# EAGLE board PCB v51 (EAGLE 9.7.0)
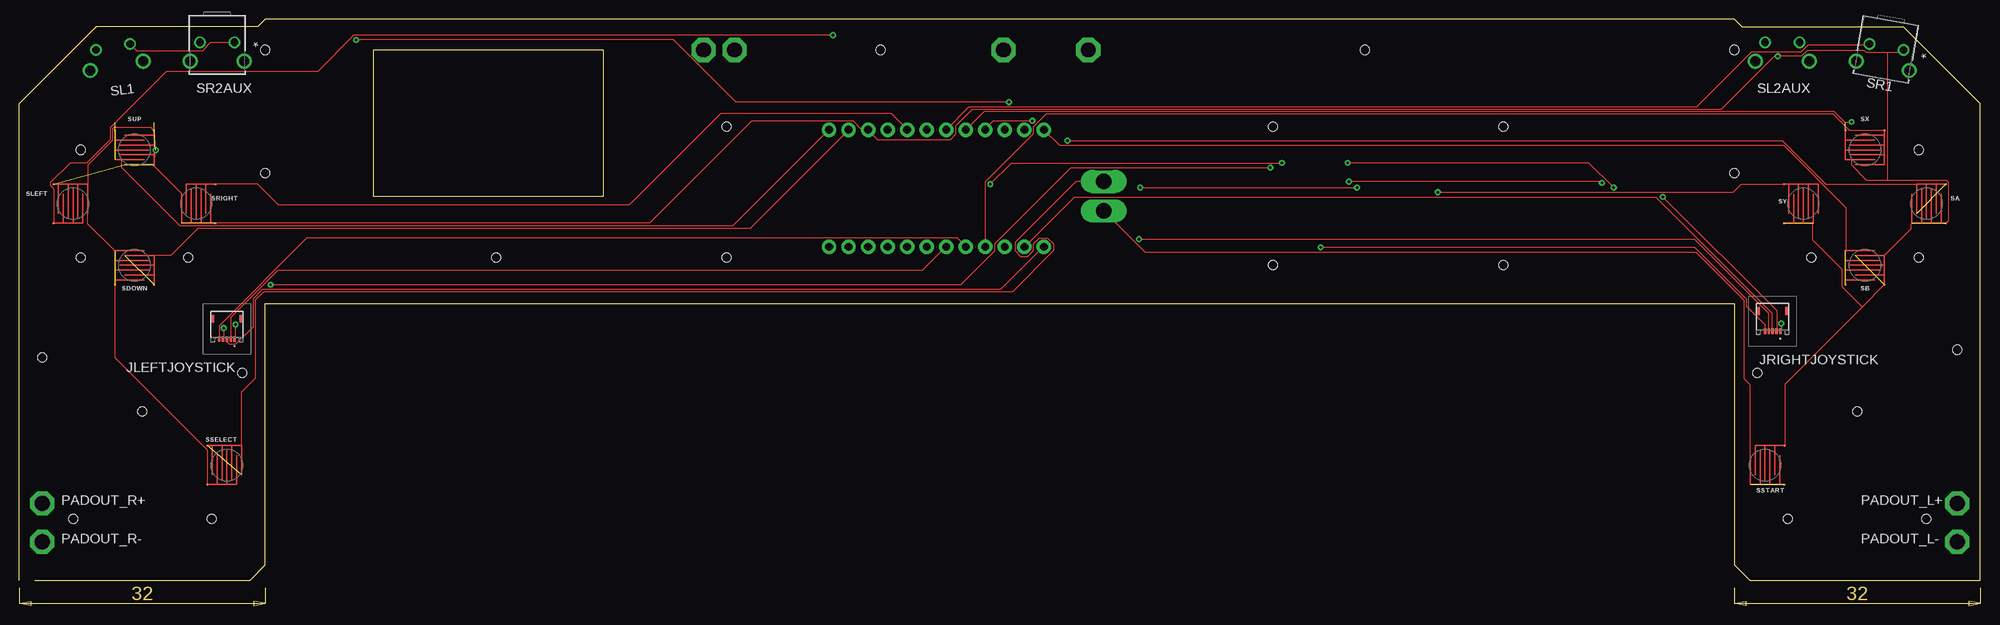
[diagram p0: board, top side]
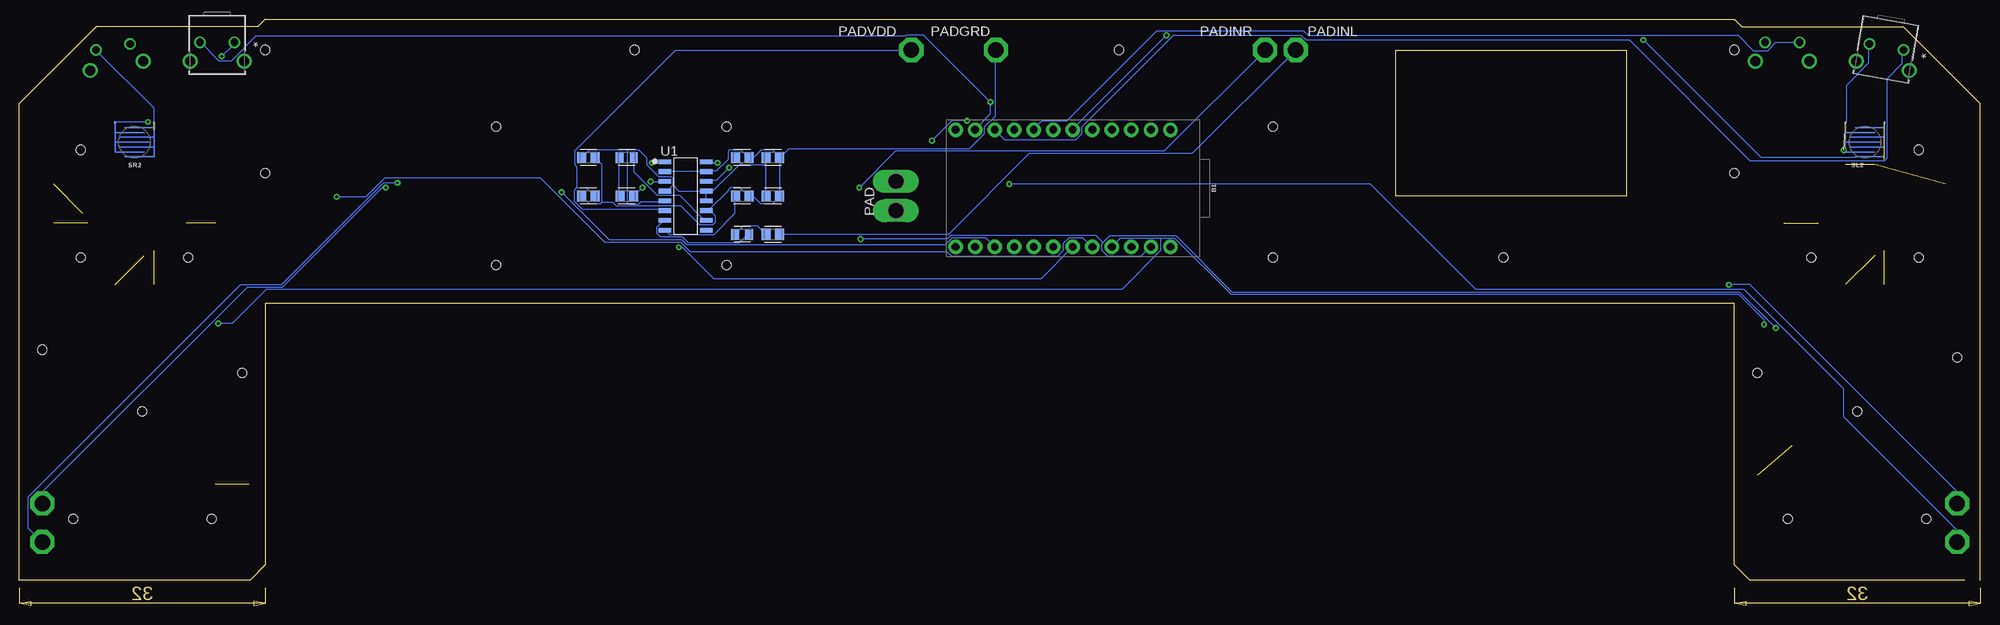
[diagram p1: board, bottom side, seen from below]

Size 255 x 73 mm. Coordinates in mm from the lower left corner, seen from the top.
Outline: 2,0 30,0 32,2 32,36 223,36 223,2 225,0 255,0 255,62 245,72 224,72 223,73 32,73 31,72 10,72 0,62 0,0
Outline: 46,69 46,50 76,50 76,69 46,69
Copper layers (1*16): Top / Bottom
Stack-up Default Layer Stack: Top User Defined 0.035mm / Dielectric-1 User Defined 1.5mm / Bottom User Defined 0.035mm
Design rules "default": minimum track width 6mil, minimum drill 0.35mm, track to track 6mil, track to pad 6mil, pad to pad 6mil, via to via 6mil, smd to smd 6mil, copper to edge 40mil, drill to drill 6mil, minimum pad ring 10mil, minimum via ring 8mil, stop-mask expansion 4mil, vias tented up to drill 0mil, thermal gap 10mil
Holes 1.2 mm at 7,8 25,8 16,22 3,29 29,27 248,8 230,8 239,22 226,27 252,30 32,69 223,69 62,42 92,42 193,41 163,41 163,59 193,59 8,42 22,42 8,56 112,69 175,69 233,42 247,42 247,56 223,53 32,53 92,59

## Footprints (pad centres in the part's own frame; a part is rotated, then mirrored left to right if it is on the bottom)
SPARKFUN_PRO_MICRO = drill 1.016 pad 1.88: 1 -7.62,12.7; 2 -7.62,10.16; 3 -7.62,7.62; 4 -7.62,5.08; 5 -7.62,2.54; 6 -7.62,0; 7 -7.62,-2.54; 8 -7.62,-5.08; 9 -7.62,-7.62; 10 -7.62,-10.16; 11 -7.62,-12.7; 12 -7.62,-15.24; 13 7.62,-15.24; 14 7.62,-12.7; 15 7.62,-10.16; 16 7.62,-7.62; 17 7.62,-5.08; 18 7.62,-2.54; 19 7.62,0; 20 7.62,2.54; 21 7.62,5.08; 22 7.62,7.62; 23 7.62,10.16; 24 7.62,12.7
CAPC2012X110 = smd 1.165 x 1.465: 1 -0.875,0; 2 0.875,0
5034800500 = smd 0.3 x 0.7: 1 -1,1.6; 2 -0.5,1.6; 3 0,1.6; 4 0.5,1.6; 5 1,1.6 | smd 0.3 x 1: MP1 -1.79,-1.05; MP2 1.79,-1.05
P2-38-20 = drill 2.007 pad 2.54 long: TP-1 -1.905,0; TP-2 1.905,0
P1-20 = drill 2.007 pad 3.15 octagon: TP 0,0
RESC2012X65 = smd 1.031 x 1.42: 1 -0.919,0; 2 0.919,0
BUTTON-CONDUCTIVE = smd 0.203 x 0.203: 1 2.54,2.54; 2 2.54,-2.54
SW2_1825027-A = drill 0.991 pad 1.499: 1 0,0; 2 4.496,0 | drill 1.295 pad 1.803: 3 -1.245,2.489; 4 5.766,2.489
SOIC127P605X150-16N = smd 1.6 x 0.6: 1 -2.7,4.445; 2 -2.7,3.175; 3 -2.7,1.905; 4 -2.7,0.635; 5 -2.7,-0.635; 6 -2.7,-1.905; 7 -2.7,-3.175; 8 -2.7,-4.445; 9 2.7,-4.445; 10 2.7,-3.175; 11 2.7,-1.905; 12 2.7,-0.635; 13 2.7,0.635; 14 2.7,1.905; 15 2.7,3.175; 16 2.7,4.445

## Placement (x,y rotation side)
B1  SPARKFUN_PRO_MICRO  [SPARKFUN_PRO_MICRO]  118,51 270 bottom
C1  220nF  [CAPC2012X110]  157,45 0 bottom
C2  220nF  [CAPC2012X110]  176,50 0 bottom
C3  1uF  [CAPC2012X110]  161,50 0 bottom
C4  1uF  [CAPC2012X110]  181,50 0 bottom
C5  1uF  [CAPC2012X110]  181,55 0 bottom
C6  10uF  [CAPC2012X110]  157,50 0 bottom
C7  1uF  [CAPC2012X110]  157,55 0 bottom
C8  10uF  [CAPC2012X110]  161,55 0 bottom
JLEFTJOYSTICK  503480-0500  [5034800500]  27,33 180 top
JRIGHTJOYSTICK  503480-0500  [5034800500]  228,34 180 top
PAD  TP2P2-38-20  [P2-38-20]  141,50 90 bottom
PADGRD  PTR1PAD1-20  [P1-20]  128,69 0 top
PADINL  PTR1PAD1-20  [P1-20]  89,69 0 top
PADINR  PTR1PAD1-20  [P1-20]  93,69 0 top
PADOUT_L+  PTR1PAD1-20  [P1-20]  252,10 0 top
PADOUT_L-  PTR1PAD1-20  [P1-20]  252,5 0 top
PADOUT_R+  PTR1PAD1-20  [P1-20]  3,10 0 top
PADOUT_R-  PTR1PAD1-20  [P1-20]  3,5 0 top
PADVDD  PTR1PAD1-20  [P1-20]  139,69 0 top
R1  10k  [RESC2012X65]  161,45 0 bottom
R2  10k  [RESC2012X65]  176,55 0 bottom
SA  BUTTON-CONDUCTIVESMD  [BUTTON-CONDUCTIVE]  248,49 0 top
SB  BUTTON-CONDUCTIVESMD  [BUTTON-CONDUCTIVE]  240,41 270 top
SDOWN  BUTTON-CONDUCTIVESMD  [BUTTON-CONDUCTIVE]  15,41 270 top
SL1  1825027-5  [SW2_1825027-A]  10,69 170 bottom
SL2  BUTTON-CONDUCTIVESMD  [BUTTON-CONDUCTIVE]  15,57 90 bottom
SL2AUX  1825027-5  [SW2_1825027-A]  227,70 180 bottom
SLEFT  BUTTON-CONDUCTIVESMD  [BUTTON-CONDUCTIVE]  7,49 180 top
SR1  1825027-5  [SW2_1825027-A]  245,69 170 top
SR2  BUTTON-CONDUCTIVESMD  [BUTTON-CONDUCTIVE]  240,57 90 bottom
SR2AUX  1825027-5  [SW2_1825027-A]  28,70 180 top
SRIGHT  BUTTON-CONDUCTIVESMD  [BUTTON-CONDUCTIVE]  23,49 0 top
SSELECT  BUTTON-CONDUCTIVESMD  [BUTTON-CONDUCTIVE]  27,15 180 top
SSTART  BUTTON-CONDUCTIVESMD  [BUTTON-CONDUCTIVE]  227,15 0 top
SUP  BUTTON-CONDUCTIVESMD  [BUTTON-CONDUCTIVE]  15,56 90 top
SX  BUTTON-CONDUCTIVESMD  [BUTTON-CONDUCTIVE]  240,56 90 top
SY  BUTTON-CONDUCTIVESMD  [BUTTON-CONDUCTIVE]  232,49 180 top
U1  PAM8403DR  [SOIC127P605X150-16N]  168.34,50 0 bottom

## Library data of the parts
B1 = SparkFun-Boards
C1-C8 = Capacitor; CATEGORY: Capacitor
JLEFTJOYSTICK JRIGHTJOYSTICK = SamacSys_Parts; DESCRIPTION: FFC & FPC Connectors 0.5mm FPC BF H=1.0 Assy 5P; HEIGHT: 1.3mm; MANUFACTURER_NAME: Molex; MANUFACTURER_PART_NUMBER: 503480-0500; MOUSER_PART_NUMBER: 538-503480-0500; MOUSER_PRICE-STOCK: https://www.mouser.co.uk/ProductDetail/Molex/503480-0500?qs=gt1LBUVyoHk%2Fe71glqHWvw%3D%3D
PAD PADGRD PADINL PADINR PADOUT_L+ PADOUT_L- PADOUT_R+ PADOUT_R- PADVDD = testpad
R1 R2 = Resistor; CATEGORY: Resistor; SUB-CATEGORY: Fixed
SA SB SDOWN SL2 SLEFT SR2 SRIGHT SSELECT SSTART SUP SX SY = SparkFun-Switches
SL1 SL2AUX SR1 SR2AUX = Switches; BUILT_BY: EMA_UL_Team; CATEGORY: Tactile Switches; CONFIGURATION__POLE-THROW_: Single Pole - Single Throw; CONTACT_CURRENT_RATING: 50; COPYRIGHT: Copyright (C) 2016 Accelerated Designs. All rights reserved; DESCRIPTION: FSMRA2JH04=R/A,TACT PB SW,160G; MANUFACTURER_PART_NUMBER: 1825027-5; MAX_SWITCHING_CURRENT: -; MAX_SWITCHING_VOLTAGE_AC_: -; PART_STATUS: active; PRODUCT_TYPE: Switch; SERIES: Unknown; SWITCH_TYPE: Tactile Switches; TE_INTERNAL_NUMBER: 1825027-5; TE_PART_NUMBER: 1825027-5; VENDOR: TE Connectivity; VOLTAGE_RATING: -
U1 = SnapEDA Library; MANUFACTURER: Diodes

## Nets
GND: B1.4
N$2: B1.1 SUP.1
N$3: B1.2 SDOWN.1
N$4: B1.5 SRIGHT.1
N$5: B1.13 JLEFTJOYSTICK.3
N$6: B1.6 SLEFT.1
N$7: B1.7 SR1.2
N$8: B1.8 SR2.1 SR2AUX.2
N$9: B1.9 SA.1
N$10: B1.14 JRIGHTJOYSTICK.3
N$11: B1.12 SB.2
N$12: B1.11 SL2.2 SL2AUX.2
N$13: B1.10 SL1.1
N$14: B1.15 SY.2
N$15: B1.16 SX.2
N$16: PAD.TP-2 SSELECT.2
N$17: PAD.TP-1 SSTART.2
N$18: C1.1 R1.1
N$19: C2.1 R2.1
N$20: R2.2 U1.10
N$21: R1.2 U1.7
N$22: C4.2 PADVDD.TP U1.6
N$23: PADOUT_R+.TP U1.14
N$24: PADOUT_R-.TP U1.16
N$25: PADOUT_L-.TP U1.3
N$26: PADOUT_L+.TP U1.1
N$27: C3.1 U1.8
N$28: C5.1 C6.1 C7.1 C8.1 U1.4 U1.5 U1.12 U1.13
N$29: C3.2 C4.1 C5.2 C6.2 C7.2 C8.2 PADGRD.TP U1.2 U1.11 U1.15
N$30: B1.21 JLEFTJOYSTICK.1 JRIGHTJOYSTICK.1
N$31: B1.23 JLEFTJOYSTICK.4 JRIGHTJOYSTICK.4
N$32: C1.2 PADINL.TP
N$33: C2.2 PADINR.TP
N$34: B1.20 JRIGHTJOYSTICK.2
N$35: B1.19 JRIGHTJOYSTICK.5
N$36: B1.18 JLEFTJOYSTICK.2
N$37: B1.17 JLEFTJOYSTICK.5
N$38: B1.3 SA.2 SB.1 SDOWN.2 SL1.2 SL2.1 SL2AUX.1 SLEFT.2 SR1.1 SR2.2 SR2AUX.1 SRIGHT.2 SSELECT.1 SSTART.1 SUP.2 SX.1 SY.1
RAW: B1.24

## Tracks (layer width: path | path; a pad name or v marks a point on that pad's centre or on a via)
N$2  (1 unrouted)
  Top 0.152: 12.46,54.73 13.33,54.76 13.33,53.69 20.95,46.07 92.73,46.07 105.22,58.57 B1.1
N$3  (1 unrouted)
  Top 0.152: 13.73,42.27 17.59,42.26 19.73,42.26 23.23,45.77 95.01,45.77 107.82,58.57 B1.2
N$4
  Top 0.152: SRIGHT.1 25.52,51.56 31.01,51.56 33.75,48.82 79.32,48.82 91.2,60.7 113.45,60.7 115.44,58.72 B1.5
N$5
  Top 0.152: JLEFTJOYSTICK.3 27.04,31.29 27.04,30.98 27.35,30.68 28.11,30.68 30.4,32.97 30.4,36.62 31.62,37.84 127.63,37.84 133.11,43.33 B1.13
N$6  (via drill 0.35)
  Top 0.152: v105.83,70.91 43.5,70.91 38.78,66.19 19.12,66.19 11.8,58.87 11.8,57.35 8.76,54.3 6.62,54.3 4.03,51.71 4.03,51.41 4.49,50.95 4.49,46.53 SLEFT.1
  Bottom 0.152: v105.83,70.91 118.03,58.72 B1.6
N$7
  Top 0.152: SR1.2 240.56,69.69 232.63,69.69 231.72,68.78 225.32,68.78 218.15,61.62 123.51,61.62 120.62,58.72 B1.7
N$8  (via drill 0.35)
  Top 0.152: v238.27,59.64 237.36,59.64 235.98,61.01 125.49,61.01 123.21,58.72 B1.8
  Bottom 0.152: v238.27,59.64 242.54,59.64 SR2.1 | SR2AUX.2 23.54,70 26.59,70 27.65,68.93 29.48,68.93 31.46,70.91 87.39,70.91 88,71.52 107.05,71.52 118.79,59.79 121.99,59.79 123.06,58.72 B1.8
N$9  (via drill 0.35)  (1 unrouted)
  Top 0.152: v136.31,57.2 229.28,57.2 234.92,51.56 246.65,51.56 246.73,47.73 | v131.74,59.79 126.71,59.79 125.65,58.72 B1.9
  Bottom 0.152: v136.31,57.2 133.72,59.79 v131.74,59.79
N$10
  Top 0.152: JRIGHTJOYSTICK.3 227.91,32.51 227.91,34.8 212.82,49.88 137.23,49.88 130.83,43.48 B1.14
N$11  (1 unrouted)
  Top 0.152: 237.46,42.91 237.51,42.87 237.51,48.51 229.43,56.59 135.25,56.59 133.27,58.57 B1.12
N$12  (via drill 0.35)  (1 unrouted)
  Top 0.152: v43.81,70.3 85.11,70.3 93.19,62.23 v128.69,62.23
  Bottom 0.152: v43.81,70.3 28.57,55.06 16.22,55.06 12.46,55.09 | B1.11 130.68,58.72 128.69,60.7 v128.69,62.23 137.38,70.91 139.67,70.91 139.82,70.76 224.25,70.76 227.45,67.56 228.97,67.56 231.41,70 SL2AUX.2
N$13
  Bottom 0.152: SL1.1 10.13,68.93 10.13,67.26 12.11,65.28 12.11,54.91 12.41,54.61 29.94,54.61 45.64,70.3 87.7,70.3 88.31,70.91 104.92,70.91 116.81,59.03 116.81,58.11 117.57,57.35 126.87,57.35 128.09,58.57 B1.10
N$14  (via drill 0.35)
  Top 0.152: v184.47,50.49 222.88,50.49 223.94,51.56 229.43,51.56 SY.2
  Bottom 0.152: v184.47,50.49 178.22,44.24 168.78,44.24 168.17,43.63 134.64,43.63 133.72,44.55 129.3,44.55 128.24,43.48 B1.15
N$15
  Top 0.152: SX.2 242.54,58.57 237.97,58.57 235.83,60.7 133.57,60.7 131.9,59.03 131.9,58.11 125.65,51.86 125.65,43.48 B1.16
N$16  (1 unrouted)
  Top 0.152: 28.91,13.73 28.87,17.57 28.87,24.43 30.7,26.26 30.7,36.47 31.77,37.54 129.15,37.54 134.49,42.87 134.49,43.79 133.72,44.55 132.66,44.55 131.9,43.79 131.9,42.87 131.13,42.11 130.22,42.11 129.46,42.87 129.46,43.94 137.38,51.86 140.89,51.86 PAD.TP-2
N$17  (1 unrouted)
  Top 0.152: 225.09,12.46 225.01,16.2 225.01,25.5 224.25,26.26 224.25,36.47 218,42.72 146.37,42.72 141.04,48.05 PAD.TP-1
N$18
  Bottom 0.152: R1.1 160.85,46.07 159.02,46.07 157.96,45.01 C1.1
N$19
  Bottom 0.152: R2.1 177,54.91 177,50.03 C2.1
N$20
  Bottom 0.152: R2.2 175.02,54.91 175.02,53.08 171.98,50.03 169.08,50.03 165.73,46.68 U1.10
N$21
  Bottom 0.152: R1.2 160.09,44.85 160.39,44.85 161.31,43.94 168.01,43.94 168.78,44.7 171.67,44.7 172.13,45.16 172.13,45.92 171.37,46.68 171.06,46.68 U1.7
N$22
  Bottom 0.152: 182.49,51.1 181.27,51.1 180.21,50.03 C4.2 | 182.49,51.1 182.8,50.8 182.8,49.27 181.73,48.21 171.06,48.21 U1.6 | 182.49,51.1 182.49,53.84 182.8,54.15 182.8,55.83 169.69,68.93 139.06,68.93 PADVDD.TP
N$23  (via drill 0.35)
  Top 0.152: v162.68,53.69 136.77,53.69 126.87,43.79 126.87,42.87 122.45,38.45 v32.68,38.45
  Bottom 0.152: v162.68,53.69 164.36,52.02 165.57,52.02 U1.14 | v32.68,38.45 29.94,38.45 3.12,11.63 3.12,10.11 PADOUT_R+.TP
N$24  (via drill 0.35)
  Top 0.152: v164.2,54.3 129,54.3 v126.26,51.56
  Bottom 0.152: v164.2,54.3 165.57,54.3 U1.16 | v126.26,51.56 79.32,51.56 65.6,37.84 30.7,37.84 17.75,24.89 17.75,21.23 3.12,6.6 3.12,5.08 PADOUT_R-.TP
N$25  (via drill 0.35)
  Top 0.152: v172.89,51.86 205.66,51.86 v205.81,51.71
  Bottom 0.152: v172.89,51.86 171.06,51.86 U1.3 | v205.81,51.71 207.64,51.71 220.9,38.45 226.23,38.45 253.81,10.87 253.81,6.75 252.14,5.08 PADOUT_L-.TP
N$26  (via drill 0.35)
  Top 0.152: v172.74,54.3 204.13,54.3 v207.33,51.1
  Bottom 0.152: v172.74,54.3 171.06,54.3 U1.1 | v207.33,51.1 207.79,51.1 220.74,38.15 225.32,38.15 251.99,11.48 251.99,10.11 PADOUT_L+.TP
N$27
  Bottom 0.152: C3.1 161.92,49.88 161.92,47.75 164.66,45.01 170.45,45.01 170.91,45.46 U1.8
N$28
  Bottom 0.152: 157.96,54 157.96,54.91 C7.1 | 157.96,54 157.96,50.03 C6.1 | 161.16,54.3 160.85,54 157.96,54 | 161.16,54.3 161.76,54.91 C8.1 | U1.12 165.73,49.43 165.73,50.49 U1.13 | 175.94,55.98 174.41,55.98 173.35,54.91 173.35,54 171.82,52.47 170.15,52.47 170,52.32 170,51.41 | 175.94,55.98 180.81,55.98 181.73,55.06 C5.1 | 170,51.41 170.91,50.49 U1.4 | 175.94,55.98 175.94,49.12 175.79,48.97 174.41,48.97 174.11,49.27 171.06,49.27 U1.5 | 170,51.41 169.23,50.65 165.73,50.65 U1.13 | 161.16,54.3 164.81,50.65 165.57,50.65 U1.13
N$29
  Bottom 0.152: 179.29,49.12 179.44,48.97 180.81,48.97 181.73,49.88 C4.1 | 179.29,49.12 179.29,54.15 180.05,54.91 C5.2 | U1.2 170.91,53.24 165.73,53.24 U1.15 165.57,53.24 164.36,53.24 162.83,54.76 162.83,55.83 162.68,55.98 161.16,55.98 160.24,55.06 C8.2 160.09,55.06 159.48,55.06 158.56,55.98 157.04,55.98 156.13,55.06 C7.2 | C7.2 156.13,54.91 156.13,50.03 C6.2 156.13,49.88 157.04,48.97 158.56,48.97 159.48,49.88 160.09,49.88 C3.2 160.24,50.03 161.31,51.1 162.53,51.1 162.83,50.8 162.83,50.65 165.27,48.21 | 165.27,48.21 165.57,48.21 U1.11 165.27,48.21 | 179.29,49.12 177.77,49.12 177.31,48.66 168.93,48.66 166.49,46.23 164.81,46.23 164.51,46.53 164.51,47.44 165.27,48.21 | PADGRD.TP 128.09,68.93 128.09,60.4 129.46,59.03 129.46,58.11 131.44,56.13 154.91,56.13 155.97,55.06 C7.2
N$30  (via drill 0.35)
  Top 0.152: v28.11,33.27 28.11,31.44 JLEFTJOYSTICK.1 | v229.13,33.42 229.13,32.51 JRIGHTJOYSTICK.1
  Bottom 0.152: v28.11,33.27 28.11,33.88 31.46,37.23 97.45,37.23 104.77,44.55 106.6,44.55 | 106.6,44.55 111.78,44.55 112.84,43.48 B1.21 | v229.13,33.42 227.3,33.42 222.88,37.84 111.63,37.84 106.6,42.87 106.6,44.55
N$31  (via drill 0.35)
  Top 0.152: v26.59,32.81 26.59,31.44 JLEFTJOYSTICK.4 | v145.61,44.4 217.85,44.4 227.45,34.8 227.45,32.51 JRIGHTJOYSTICK.4
  Bottom 0.152: v26.59,32.81 31.31,37.54 97.3,37.54 104.61,44.85 113.15,44.85 114.06,43.94 | 114.06,43.94 114.22,43.79 114.22,42.87 113.45,42.11 109.19,42.11 107.97,43.33 B1.23 | v145.61,44.4 134.33,44.4 133.88,44.85 114.98,44.85 114.06,43.94
N$32
  Bottom 0.152: C1.2 155.97,45.01 134.18,45.01 123.66,55.52 102.48,55.52 89.07,68.93 PADINL.TP
N$33  (via drill 0.35)
  Top 0.152: v145.76,51.1 v173.96,51.1
  Bottom 0.152: v173.96,51.1 175.02,50.03 C2.2 | v145.76,51.1 141.04,55.83 106.14,55.83 93.03,68.93 PADINR.TP
N$34  (via drill 0.35)
  Top 0.152: v213.73,49.88 228.52,35.1 228.52,32.51 JRIGHTJOYSTICK.2
  Bottom 0.152: v213.73,49.88 209.92,49.88 207.49,52.32 187.22,52.32 178.83,43.94 168.93,43.94 167.71,42.72 134.33,42.72 133.72,42.11 120.01,42.11 119.25,42.87 119.25,43.79 118.48,44.55 116.66,44.55 115.59,43.48 B1.20
N$35  (via drill 0.35)
  Top 0.152: v169.23,43.33 217.85,43.33 224.55,36.62 224.55,35.71 226.99,33.27 226.99,32.51 JRIGHTJOYSTICK.5
  Bottom 0.152: v169.23,43.33 168.78,43.33 164.66,39.22 122.14,39.22 118.03,43.33 B1.19
N$36
  Top 0.152: JLEFTJOYSTICK.2 27.5,31.44 27.5,34.19 33.6,40.28 117.42,40.28 120.47,43.33 B1.18
N$37
  Top 0.152: JLEFTJOYSTICK.5 25.98,31.44 25.98,33.12 37.41,44.55 121.99,44.55 123.06,43.48 B1.17
N$38  (via drill 0.35)  (10 unrouted)
  Top 0.152: 242.99,68.63 244.67,68.63 244.98,68.93 SR1.1 | 242.99,68.63 240.25,68.63 239.95,68.93 232.48,68.93 231.72,68.17 v228.67,68.17 228.21,68.17 221.35,61.31 123.97,61.31 121.84,59.18 121.84,58.11 121.07,57.35 111.63,57.35 110.41,58.57 B1.3 110.25,58.72 109.49,58.72 108.42,59.79 95.32,59.79 82.06,46.53 25.52,46.53 SRIGHT.2 | 242.99,52.02 250.61,52.02 250.92,51.71 250.92,46.84 250.61,46.53 SA.2 | 242.99,52.02 240.25,52.02 238.27,54 238.27,54.76 237.46,54.73 | 239.64,35.56 SB.1 | 239.64,35.56 229.58,25.5 229.58,17.57 SSTART.1 | 239.64,35.56 237.05,38.15 237.05,40.43 233.24,44.24 233.24,46.38 233.27,46.46 | 246.1,46.46 246.04,46.38 246.04,45.77 242.54,42.26 238.73,42.27 | 242.99,52.02 242.99,68.63 | SSELECT.1 24.45,12.54 24.45,16.96 12.41,29 12.41,38.45 SDOWN.2 | 12.46,42.91 12.41,42.87 8.91,46.38 8.91,47.75 8.91,47.73 8.91,51.56 8.91,54 12.11,57.2 12.11,58.72 12.26,58.87 17.14,58.87 17.44,58.57 SUP.2 | SR2AUX.1 27.96,70 24.91,70 23.84,68.93 15.31,68.93 14.55,69.69 SL1.2 | 21.09,46.46 21.1,50.34 17.44,54 13.73,54.09 | v17.75,55.98 17.59,55.98 17.54,54.09
  Bottom 0.152: SR2.2 237.51,59.64 237.51,61.47 244.98,68.93 SR1.1 | v228.67,68.17 227.15,69.69 227.15,70 SL2AUX.1 | SL2.1 17.44,59.64 17.44,64.36 14.55,67.26 14.55,69.69 SL1.2 | v17.75,55.98 17.59,55.98 17.54,55.73